# Altium PCB DBL 165 SerialIn Register (v2).PcbDoc
Units mm, origin at the board's own origin, x right, y up, seen from the top; angles counter-clockwise.
Board outline 152.4 x 101.6 mm, 2 copper layers (Top Layer, Bottom Layer); 50 components, 41 nets, 195 pads, 24 vias.
Unrouted connection lines stored in the file: 2.
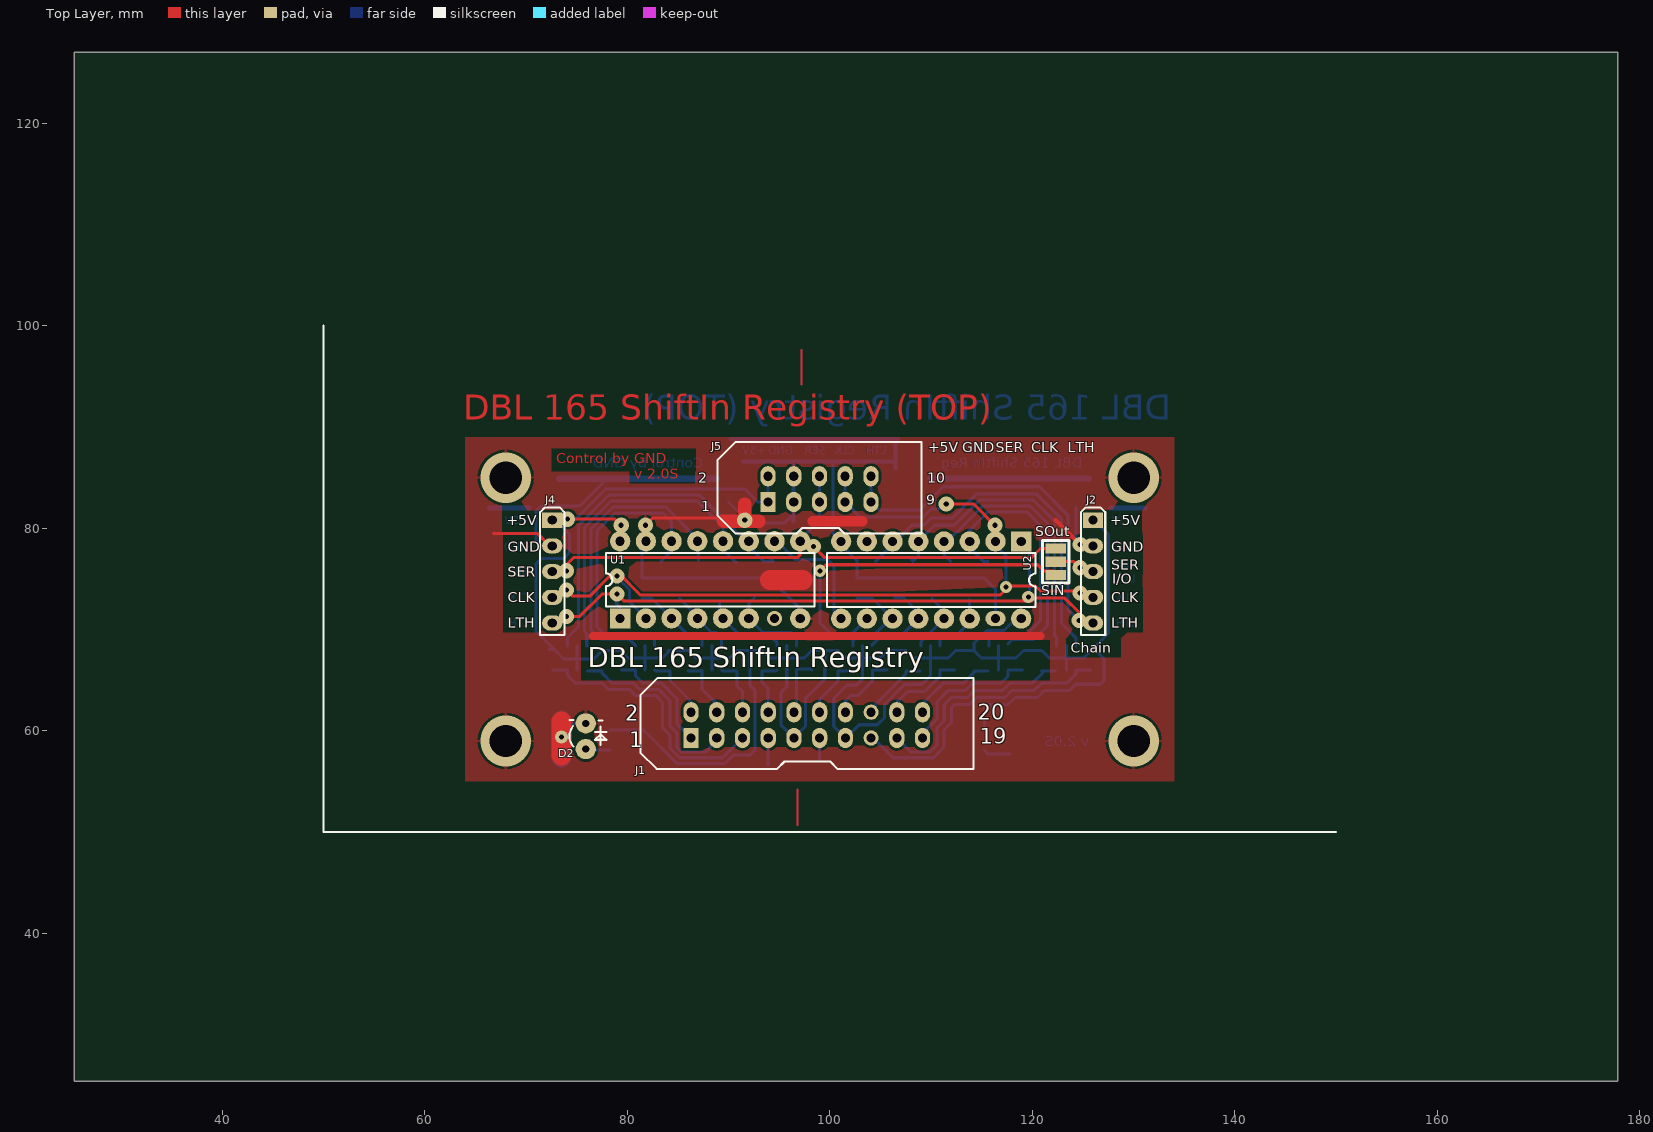
[diagram p0: Top Layer view]
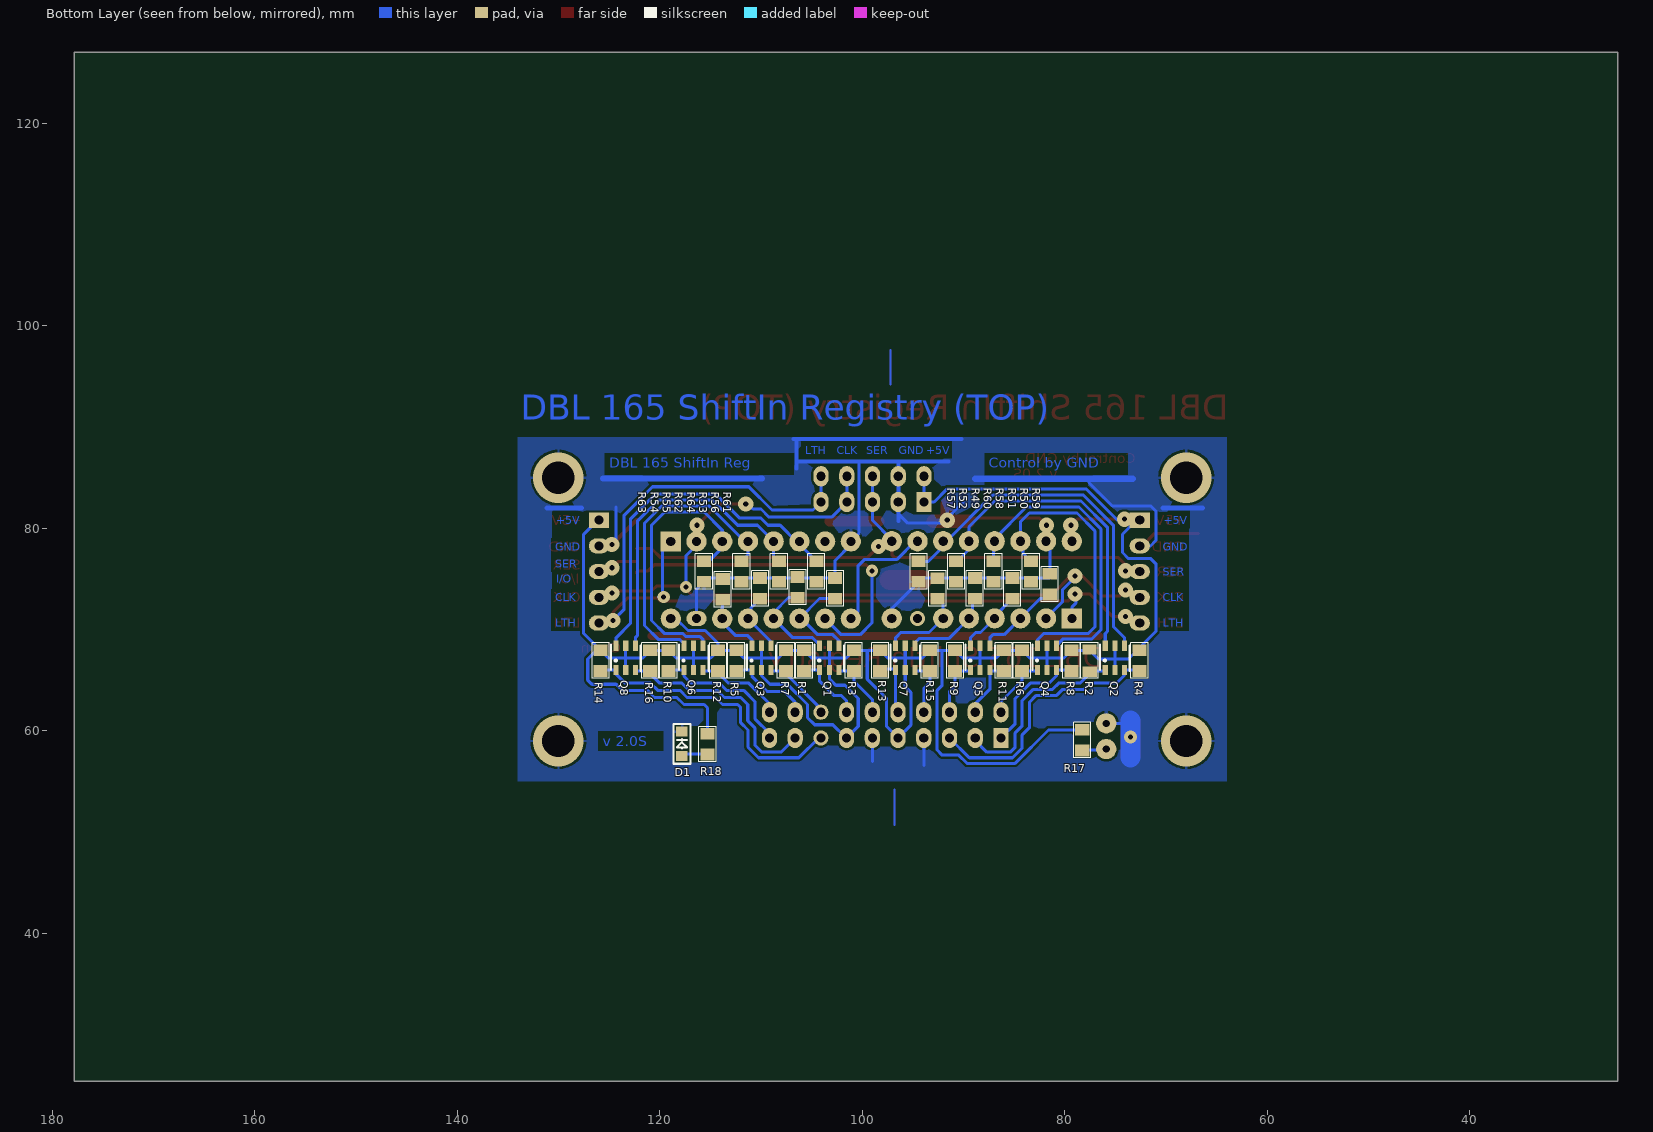
[diagram p1: Bottom Layer view, seen from below]
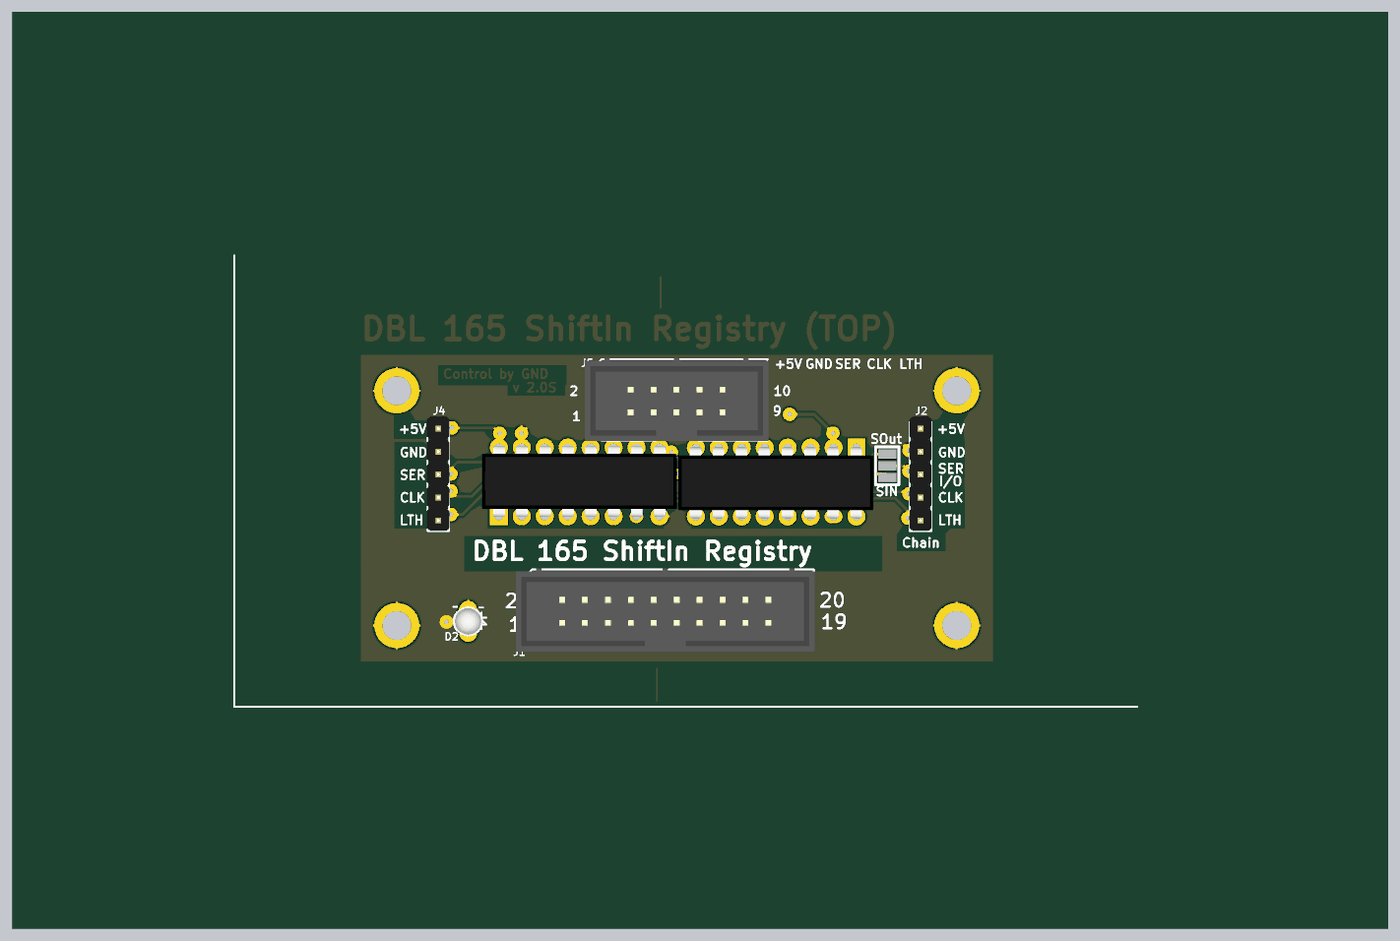
[diagram p2: 3D render of the assembled board from above, using the file's embedded part models]
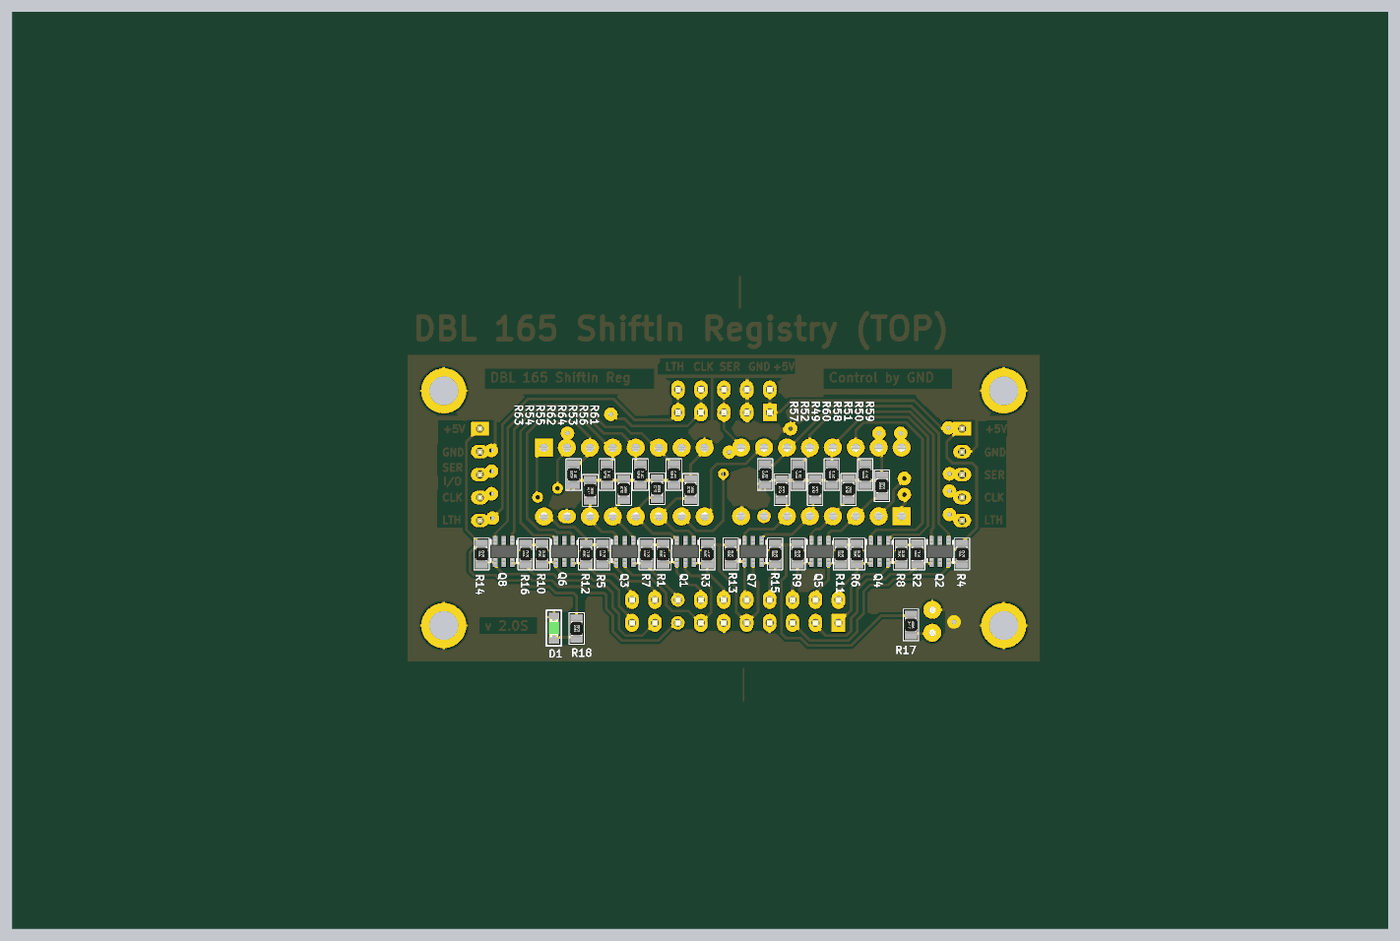
[diagram p3: 3D render of the assembled board from below, using the file's embedded part models]

## Layer stack, top to bottom
Top Solder: solder mask 0.0102, Solder Resist, Dk 3.5
Top Layer: signal copper 0.0356
Dielectric 1: dielectric 0.32, FR-4, Dk 4.8
Bottom Layer: signal copper 0.0356
Bottom Solder: solder mask 0.0102, Solder Resist, Dk 3.5

## Board outline
25.4,25.4 177.8,25.4 177.8,127 25.4,127

## Design rules (kind name [scope] priority, off if disabled: settings)
Clearance [All] p1: gap=0.25
ComponentClearance [All] p1: gap=0.1 collisioncheckmode=3 verticalgap=0.01 showdistances=FALSE
PolygonConnect [All] p1: connectstyle=Relief reliefconductorwidth=0.254 reliefentries=4 polygonreliefangle="90 Angle" airgapwidth=0.254
RoutingVias [All] p1: holewidth=0.711 width=1.27 viastyle="Through Hole" minholewidth=0.711 minwidth=1.27 maxholewidth=0.711 maxwidth=1.27
SilkToSilkClearance [All] p1: silktosilkclearance=0.01
SolderMaskExpansion [All] p1: expansion=0.102
Width [All] p1: maxlimit=2 minlimit=0.2 preferedwidth=0.5
27 further rules are at their usual default settings.

## Components (designator, comment, footprint, x,y, rotation, side; value= is the part's Value field where it differs from the comment)
D1 "Green" "LED SMD 0805 Green" 117.8,57.5 r90 bottom
D2 "FYL-3014GD" "LED Round 3mm Green" 75.9,58.2 r90 top
J1 "Input Buttons/keys" "LINE 2.54 x 20D (2 x 10) - BH" 86.3,59.3 r90 top
J2 "I/O Interface Connector" "Line 2.54 x 5" 126,80.8 r0 top
J4 "Interface Connector" "Line 2.54 x 5" 72.6,80.8 r0 top
J5 "Interface Connector" "LINE 2.54 x 10D (2 x 5) - BH" 93.9,82.6 r90 top
Q1 "IRF5850" TSOP-6 104.2,66 r90 bottom
Q2 "IRF5850" TSOP-6 76,66 r90 bottom
Q3 "IRF5850" TSOP-6 110.9,66 r90 bottom
Q4 "IRF5850" TSOP-6 82.7,66 r90 bottom
Q5 "IRF5850" TSOP-6 89.3,66 r90 bottom
Q6 "IRF5850" TSOP-6 117.6,66 r90 bottom
Q7 "IRF5850" TSOP-6 96.7,66 r90 bottom
Q8 "IRF5850" TSOP-6 124.3,66 r90 bottom
R1 "10kOm" "SMD 0805 (2012)"#1 105.7,65.9 r90 bottom
R2 "10kOm" "SMD 0805 (2012)"#2 77.525,65.909 r90 bottom
R3 "10kOm" "SMD 0805 (2012)"#1 100.8,65.9 r90 bottom
R4 "10kOm" "SMD 0805 (2012)"#1 72.6,65.9 r90 bottom
R5 "10kOm" "SMD 0805 (2012)"#1 112.4,65.9 r90 bottom
R6 "10kOm" "SMD 0805 (2012)"#1 84.2,65.9 r90 bottom
R7 "10kOm" "SMD 0805 (2012)"#1 107.5,65.9 r90 bottom
R8 "10kOm" "SMD 0805 (2012)"#1 79.3,65.9 r90 bottom
R9 "10kOm" "SMD 0805 (2012)"#1 90.8,65.9 r90 bottom
R10 "10kOm" "SMD 0805 (2012)"#1 119.1,65.9 r90 bottom
R11 "10kOm" "SMD 0805 (2012)"#1 86,65.9 r90 bottom
R12 "10kOm" "SMD 0805 (2012)"#1 114.2,65.9 r90 bottom
R13 "10kOm" "SMD 0805 (2012)"#1 98.2,65.9 r90 bottom
R14 "10kOm" "SMD 0805 (2012)"#1 125.8,65.9 r90 bottom
R15 "10kOm" "SMD 0805 (2012)"#1 93.3,65.9 r90 bottom
R16 "10kOm" "SMD 0805 (2012)"#1 120.9,65.9 r90 bottom
R17 "4.7k Om" "SMD 0805 (2012)"#1 78.3,60.1 r270 bottom
R18 "4.7k Om" "SMD 0805 (2012)"#1 115.3,59.7 r270 bottom
R49 "10kOm" "SMD 0805 (2012)"#1 90.7,74.7 r90 bottom
R50 "10kOm" "SMD 0805 (2012)"#1 83.3,74.7 r90 bottom
R51 "10kOm" "SMD 0805 (2012)"#1 85.2,75.1 r270 bottom
R52 "10kOm" "SMD 0805 (2012)"#1 92.6,75.091 r270 bottom
R53 "10kOm" "SMD 0805 (2012)"#1 106.4,75.2 r270 bottom
R54 "10kOm" "SMD 0805 (2012)"#1 113.8,75 r270 bottom
R55 "10kOm" "SMD 0805 (2012)"#1 111.9,74.7 r90 bottom
R56 "10kOm" "SMD 0805 (2012)"#1 104.5,74.7 r90 bottom
R57 "10kOm" "SMD 0805 (2012)"#1 94.4,74.7 r90 bottom
R58 "10kOm" "SMD 0805 (2012)"#1 87,74.7 r90 bottom
R59 "10kOm" "SMD 0805 (2012)"#1 81.5,75.5 r270 bottom
R60 "10kOm" "SMD 0805 (2012)"#1 88.9,75.1 r270 bottom
R61 "10kOm" "SMD 0805 (2012)"#1 102.7,75.1 r270 bottom
R62 "10kOm" "SMD 0805 (2012)"#1 110.1,75.1 r270 bottom
R63 "10kOm" "SMD 0805 (2012)"#1 115.6,74.7 r90 bottom
R64 "10kOm" "SMD 0805 (2012)"#1 108.2,74.7 r90 bottom
U1 "SN74HC165N" DIP-16#1 79.3,71.1 r0 top
U2 "SN74HC165N" DIP-16#2 118.9,78.7 r180 top

## Footprints (in the part's own frame and the unit in brackets; to place one, negate y for a bottom-side part, rotate by r counter-clockwise, add the part's x,y. Pads: shape width x height; smd on the part's side, far side on the other; paste and mask are expansions set on the pad)
DIP-16#1 [mm] "DIP; 16 Leads; Row Spacing 7.62 mm; Pitch 2.54 mm"
  rect 2x2 hole 0.9: 1(0,0)
  round 2 hole 0.9: 2(2.54,0) 3(5.08,0) 4(7.62,0) 5(10.16,0) 6(12.7,0) 8(17.78,0) 9(17.78,7.62) 10(15.24,7.62) 11(12.7,7.62) 12(10.16,7.62) 13(7.62,7.62) 14(5.08,7.62) 15(2.54,7.62) 16(0,7.62)
  round 1.5 hole 0.9: 7(15.24,0)
  silkscreen extent -1.41,1.16 19.19,6.46, body extent -1.87,-0.05 19.72,7.83, height 4.19
DIP-16#2 [mm] "DIP; 16 Leads; Row Spacing 7.62 mm; Pitch 2.54 mm"
  rect 2x2 hole 0.9: 1(0,0)
  round 2 hole 0.9: 2(2.54,0) 3(5.08,0) 4(7.62,0) 5(10.16,0) 6(12.7,0) 7(15.24,0) 8(17.78,0) 9(17.78,7.62) 10(15.24,7.62) 11(12.7,7.62) 12(10.16,7.62) 13(7.62,7.62) 14(5.08,7.62) 16(0,7.62)
  oval 2x1.5 hole 0.9: 15(2.54,7.62)
  silkscreen extent -1.41,1.16 19.19,6.46, body extent -1.87,-0.05 19.72,7.83, height 4.19
"LED Round 3mm Green" [mm]
  round 2 hole 0.7: A(0,0) K(2.54,0)
  silkscreen extent 0.25,-2.03 2.88,1.63, body extent -0.39,-1.65 2.91,1.64, height 5.51
"LED SMD 0805 Green" [mm]
  rect 1x1.143 smd: A(0,0) K(2.425,0)
  silkscreen extent -0.75,-0.82 3.17,0.83, body extent 0.22,-0.62 2.24,0.63, height 1.1
"Line 2.54 x 5" [mm]
  rect 2x1.5 hole 0.9: 1(0,0)
  oval 2x1.5 hole 0.9: 2(0,-2.54) 3(0,-5.08) 4(0,-7.62) 5(0,-10.16)
  silkscreen extent -1.2,-11.32 1.2,1.28, body extent -1.25,-11.33 1.25,1.37, height 8.2
"LINE 2.54 x 10D (2 x 5) - BH" [mm]
  rect 2x1.5 hole 0.9: 1(0,0)
  oval 2x1.5 hole 0.9: 2(2.54,0) 3(0,-2.54) 4(2.54,-2.54) 5(0,-5.08) 6(2.54,-5.08) 7(0,-7.62) 8(2.54,-7.62) 9(0,-10.16) 10(2.54,-10.16)
  silkscreen extent -3.1,-15.15 5.92,5, body extent -3.18,-15.25 6.03,5.1, height 8.84
"LINE 2.54 x 20D (2 x 10) - BH" [mm]
  rect 2x1.5 hole 0.9: 1(0,0)
  oval 2x1.5 hole 0.9: 2(2.54,0) 3(0,-2.54) 4(2.54,-2.54) 5(0,-5.08) 6(2.54,-5.08) 7(0,-7.62) 8(2.54,-7.62) 9(0,-10.16) 10(2.54,-10.16) 11(0,-12.7) 12(2.54,-12.7) 13(0,-15.24) 14(2.54,-15.24) 17(0,-20.32) 18(2.54,-20.32) 19(0,-22.86) 20(2.54,-22.86)
  round 1.5 hole 0.9: 15(0,-17.78) 16(2.54,-17.78)
  silkscreen extent -3.05,-27.87 5.92,5, body extent -3.18,-27.95 6.02,5.1, height 8.84
"SMD 0805 (2012)"#1 [mil]
  rect 45x55 smd: 1(0.35,0.98) 2(80.35,0.98)
  silkscreen extent -29,-32 109,34, body extent 1,-24 80,26, height 18
"SMD 0805 (2012)"#2 [mil]
  rect 39.37x55.12 smd: 1(-2.95,0) 2(83.66,0.98)
  silkscreen extent -29,-32 109,34, body extent 1,-24 80,26, height 18
TSOP-6 [mm]
  rect 1x0.5 smd: 1(0,0) 2(0,-0.95) 3(0,-1.9) 4(2.4,-1.9) 5(2.4,-0.95) 6(2.4,0)
  silkscreen extent -0.1,-2.4 2.5,0.5, body extent -0.15,-2.45 2.55,0.55, height 1

## Part data
D1: library part "Led SMD Green", "?2v ?20mA"
D2: library part "Led Round 3mm Green", "2.1v 10mA, 15-30mCd"
J1: library part "PLD-20 (2 x 10)", "Vert, Dbl line, Male"
J2 J4: library part PLS-5, "Vert, Sgl line, Male"
J5: library part "PLD-10 (2 x 5)", "Vert, Dbl line, Male"
Q1 Q2 Q3 Q4 Q5 Q6 Q7 Q8: "Dual P-Ch  20V - 0.135? - 2.2A"
R1 R2 R3 R4 R5 R6 R7 R8 R9 R10 R11 R12 R13 R14 R15 R16 R17 R18 R49 R50 R51 R52 R53 R54 R55 R56 R57 R58 R59 R60 R61 R62 R63 R64: library part "Res All Types"
U1 U2: "8-Bit Parallel-Load Shift Register"

## Free pads (board coordinates)
  rect 2x1 smd: 2(122.3,78) 3(122.3,75.4) 4(122.3,76.7)

## Via types
v1: diameter 1.5, hole 0.5, Top Layer to Bottom Layer, 16 vias
v2: diameter 5, hole 3.2, Top Layer to Bottom Layer, 4 vias
v3: diameter 1.2, hole 0.5, Top Layer to Bottom Layer, 3 vias
v4: diameter 1.3, hole 0.5, Top Layer to Bottom Layer, 1 vias

## Nets (pads, with @x,y where several pads share a name; then routed paths per layer and width w, separated by ;. In a path a pad name is that pad's centre, name@x,y a point inside that pad or via, vN(x,y) a via of type N, cw(c..) or ccw(c..) an arc to the next point about the centre after c; other vN are vias at no path point)
165TO165: U1.10 U2.9 | length 12.4
  Bottom Layer w0.3: U1.10 94.78,78.72 96.6,76.9 99.8,76.9 100.4,76.3 100.4,71.8 U2.9
+5V: J1.9 J1.13 J2.1 J4.1 J5.1 J5.2 Q1.2 Q1.5 Q2.2 Q2.5 Q3.2 Q3.5 Q4.2 Q4.5 Q5.2 Q5.5 Q6.2 Q6.5 Q7.2 Q7.5 Q8.2 Q8.5 R1.2 R2.2 R3.2 R4.2 R5.2 R6.2 R7.2 R8.2 R9.2 R10.2 R11.2 R12.2 R13.2 R14.2 R15.2 R16.2 R17.1 R18.1 U1.16 U2.16 | length 229.1
  Top Layer w0.3: v1(74.1,80.9) 78.8,80.9 v1(79.4,80.3)
  Bottom Layer w0.3: R4.2@72.259,68.041 72.625,68.041 R4.2@72.759,68.041 ; J4.1 J4.1@72.9,80.8 ; v1@74.1,80.8 J4.1@72.9,80.8 ; v1@74.8,80.8 77.9,83.9 91.6,83.9 92.9,82.6 J5.1 J5.2 ; Q2.2 75.05,67.1 ; Q2.5 75.05,67.1 ; R17.1 81.609,60.091 84.9,56.8 84.912,56.8 84.924,56.788 89.651,56.788 90.463,57.6 92.1,57.6 92.6,58.1 92.6,64 92.1,64.5 92.1,67.941 ; Q4.2 81.75,67.2 ; Q4.5 81.75,67.2 ; R6.2@84.025,67.941 R11.2 86.766,67.2 88.35,67.2 ; R6.2 83.484,67.2 81.75,67.2 ; Q5.2 88.35,67.2 ; Q5.5 88.35,67.2 ; Q7.5 95.75,67.2 ; 99.5,67.916 99.5,65.1 97.61,63.21 97.61,60.45 J1.9 95.2,60.56 95.2,63.8 95.75,64.35 Q7.2 95.75,67.2 ; J1.13 100.39,60.45 100.39,63.19 101.7,64.5 102.6,64.5 103.25,65.15 Q1.2 103.25,67.2 ; J1.13@101.7,59.4 102.9,60.6 104.7,60.6 105.4,61.3 105.4,62.6 107.4,64.6 109.1,64.6 109.95,65.45 Q3.2 109.95,67.2 ; Q1.5 103.25,67.2 ; Q3.5 109.95,67.2 ; R18.1@115.275,60.091 115.275,62.275 115.6,62.6 117.6,62.6 118.3,63.3 120.5,63.3 121.2,64 123.7,64 124.3,64.6 126.7,64.6 127.1,65 127.1,67.1 126.259,67.941 R14.2 ; Q6.2 116.65,67.2 ; Q6.5 116.65,67.2 ; U2.16 118.38,71.08 117.2,69.9 115.5,69.9 114.225,68.625 R12.2 ; Q8.2 123.35,67.2 ; Q8.5 123.35,67.2 ; J2.1@126,80.4 126.5,80.4 127.5,79.4 127.5,69.616 R14.2 ; R4.2@72.759,68.041 73.7,67.1 75.05,67.1 ; R4.2@72.759,68.041 71,69.8 71,76.5 71.5,77 73.7,77 74.3,77.6 74.3,79.4 J4.1@72.9,80.8 ; 75.05,67.1 76.684,67.1 77.525,67.941 R8.2 80.066,67.2 81.75,67.2 ; 88.35,67.2 90.1,67.2 90.841,67.941 R15.2 94.066,67.2 95.75,67.2 ; 95.75,67.2 97.484,67.2 R13.2 R3.2 101.566,67.2 103.25,67.2 ; 103.25,67.2 104.984,67.2 R1.2 R7.2 108.266,67.2 109.95,67.2 ; 109.95,67.2 111.684,67.2 R5.2 R12.2 ; R12.2 114.966,67.2 116.65,67.2 ; 116.65,67.2 118.384,67.2 R10.2 R16.2 121.666,67.2 123.35,67.2 ; 123.35,67.2 125.084,67.2 R14.2
"BT 1": J1.5 Q2.3 R4.1 | length 25.7
  Bottom Layer w0.3: R4.1@72.634,66 Q2.3 74.1,65.5 74.9,64.7 77.5,64.7 78.1,64.1 80.2,64.1 80.8,63.5 82.8,63.5 83.5,62.8 83.5,60.3 84.2,59.6 84.2,58.295 85.153,57.342 89.422,57.342 J1.5
"BT 2": J1.3 Q2.1 R2.1 | length 19.2
  Bottom Layer w0.3: Q2.1@76.091,65.909 77.525,65.909 77.525,65.675 78.5,64.7 80.6,64.7 81.2,64.1 83.1,64.1 84.2,63 84.2,60.5 84.9,59.8 84.9,58.379 85.383,57.896 87.696,57.896 88.84,59.04 J1.3
"BT 3": J1.1 Q4.3 R8.1 | length 12.1
  Bottom Layer w0.3: R8.1@79.416,66 Q4.3 80.8,65.464 81.564,64.7 83.4,64.7 84.9,63.2 84.9,60.7 J1.1 J1.1@86.3,60
"BT 4": J1.2 Q4.1 R6.1 | length 6.5
  Bottom Layer w0.3: Q4.1 82.791,65.909 R6.1 84.225,64.975 86.3,62.9 J1.2
"BT 5": J1.4 Q5.3 R11.1 | length 6.2
  Bottom Layer w0.3: R11.1 87.309,65.909 Q5.3 87.4,64.1 88.84,62.66 J1.4
"BT 6": J1.6 Q5.1 R9.1 | length 5.9
  Bottom Layer w0.3: Q5.1 89.391,65.909 R9.1 90.825,64.455 91.38,63.9 J1.6
"BT 7": J1.8 Q7.3 R15.1 | length 5.8
  Bottom Layer w0.3: J1.8 93.92,64.18 93.325,64.775 R15.1 94.709,65.909 Q7.3
"BT 8": J1.10 Q7.1 R13.1 | length 6.2
  Bottom Layer w0.3: J1.10@96.7,62.08 J1.10 96.46,62.36 96.7,62.6 Q7.1 96.8,66.1 98.134,66.1 R13.1@98.225,66.009
"BT 9": J1.12 Q1.3 R3.1 | length 6.2
  Bottom Layer w0.3: J1.12 99,63.1 100.825,64.925 R3.1 Q1.3@102.209,65.909
"BT 10": J1.14 Q1.1 R1.1 | length 7.4
  Bottom Layer w0.3: J1.14 101.54,62.94 102.1,63.5 102.817,63.5 104.2,64.883 Q1.1 R1.1@105.634,66 ; J1.14@101.7,62.3 J1.14@102,62.3
"BT 11": J1.16 Q3.3 R7.1 | length 6.9
  Bottom Layer w0.3: J1.16 104.08,62.18 107.525,65.625 R7.1 Q3.3@108.909,65.909
"BT 12": J1.18 Q3.1 R5.1 | length 8.4
  Bottom Layer w0.3: J1.18 106.62,62.82 107.7,63.9 109.4,63.9 110.9,65.4 Q3.1 R5.1@112.334,66
"BT 13": J1.20 Q6.3 R12.1 | length 8.7
  Bottom Layer w0.3: J1.20 109.16,62.66 111.2,64.7 113.2,64.7 114.225,65.725 R12.1 Q6.3@115.609,65.909
"BT 14": J1.19 Q6.1 R10.1 | length 14.3
  Bottom Layer w0.3: J1.19 109.16,59.76 110.6,61.2 110.6,62.9 111.7,64 113.4,64 114.1,64.7 116.9,64.7 117.6,65.4 Q6.1 R10.1@119.034,66
"BT 15": J1.17 Q8.3 R16.1 | length 21.6
  Bottom Layer w0.3: J1.17 108.024,57.896 109.896,57.896 110.6,58.6 110.6,60.3 111.3,61 111.3,62.6 112,63.3 113.6,63.3 114.3,64 117.1,64 117.8,64.7 120,64.7 R16.1@121.067,65.767 ; R16.1 Q8.3@122.309,65.909
"BT 16": J1.15 Q8.1 R14.1 | length 28.2
  Bottom Layer w0.3: J1.15 104.3,59.3 106.258,57.342 110.242,57.342 111.283,58.383 111.283,60.083 112,60.8 112,62.3 112.3,62.6 113.8,62.6 114.5,63.3 117.3,63.3 118,64 120.2,64 120.9,64.7 123.4,64.7 124.3,65.6 Q8.1 R14.1@125.734,66
CLK165: J2.4 J4.4 J5.7 J5.8 U1.2 U2.2 | length 82.7
  Top Layer w0.3: v1(74,73.9) 74.6,73.3 76.3,73.3 78.3,75.3 v1(79,75.3) ; v1@79.2,75.5 81.3,73.4 116.8,73.4 117.7,74.3 120.3,74.3 120.8,73.8 124.5,73.8 v1(124.7,73.6) ; v1(111.5,82.4) 114.2,82.4 v1(116.3,80.3)
  Bottom Layer w0.3: v1@78.975,75.188 80.2,73.963 80.2,72.771 81.84,71.131 U1.2 ; J5.8 J5.7 103.02,81.1 109.2,81.1 110,81.9 110.8,81.9 v1@111.5,82.6 ; U2.2 116.36,78.34 117.4,77.3 v3(117.4,74.2)
GND: D1.K D2.K J1.7 J1.11 J2.2 J4.2 J5.3 J5.4 R49.1 R50.1 R51.1 R52.1 R53.1 R54.1 R55.1 R56.1 R57.1 R58.1 R59.1 R60.1 R61.1 R62.1 R63.1 R64.1 U1.8 U1.15 U2.8 U2.15 | length 248.1
  Top Layer w0.3: 66.8,79.5 71.1,79.5 72.34,78.26 J4.2 ; v1(81.8,80.3) 82.5,81 v1@91.6,81 ; v1@91.4,80.8 v1(91.6,80.8)
  Top Layer w0.4: 122.3,80.825 v1(124.725,78.4)
  Top Layer w0.8: 76.6,69.35 120.8,69.35
  Top Layer w1: 98.3,80.7 103.2,80.7
  Top Layer w1.3: 89.5,80.7 93,80.7 ; v1(91.6,80.8) 91.6,82.4
  Top Layer w2: 73.5,57.6 v4(73.5,59.4) 73.5,60.9 ; 94.1,74.9 97.302,74.9
  Bottom Layer w0.3: J4.2 71.54,78.26 71,78.8 71,81.7 71.5,82.2 75.3,82.2 77.6,84.5 ; 73.5,61 73.76,60.74 D2.K ; U1.15@81.475,77.825 81.475,75.091 R51.1 R60.1 94.043,75.091 R57.1 97.08,72.054 U1.8 ; U1.15@81.84,78.035 U1.15 ; 90,82.6 92.1,80.5 95.5,80.5 96.4,81.4 96.44,81.44 J5.3 J5.3@96.44,83.06 ; v1@91.4,80.8 v1(91.6,80.8) ; 93.92,56.57 J1.7 ; 98.961,56.955 J1.11@98.961,59.295 ; 100.3,86.6 100.3,79.52 U2.8 101.12,78.38 102.675,76.825 R61.1 R62.1 115.243,75.091 R63.1 116.36,73.974 U2.15 U2.15@116.36,71.79 ; v1@124.3,78.3 124.3,82.1
  Bottom Layer w0.4: 90.2,88.8 106.8,88.8 ; 91.5,86.6 96.4,86.6 ; 96.4,80.7 96.4,81.4 96.4,86.6 ; 106.5,85.9 106.5,88.8 ; 106.5,86.6 100.3,86.6 96.4,86.6
  Bottom Layer w0.5: 66.4,82 70.3,82 ; 127.7,82 131.1,82
  Bottom Layer w0.6: 109.9,84.9 125.6,84.9
  Bottom Layer w0.65: 73.3,84.873 88.827,84.873
  Bottom Layer w2: 73.5,57.4 v4(73.5,59.4) 73.5,61
  other v2: 68,59 130,59 68,85 130,85
"IN 1": Q2.4 R57.2 U1.11 | length 36.4
  Bottom Layer w0.3: Q2.4 74.1,69.2 75.2,70.3 75.2,80.3 78.2,83.3 87.1,83.3 91.68,78.72 U1.11 92,78.2 93.459,76.741 R57.2 R57.2@94.066,77.1
"IN 2": Q2.6 R49.2 U1.12 | length 31.6
  Bottom Layer w0.3: Q2.6 76,69.6 75.8,69.8 75.8,80.1 78.4,82.7 86.9,82.7 89.46,80.14 U1.12 89.46,77.906 90.725,76.641 R49.2@90.725,76.655
"IN 3": Q4.4 R58.2 U1.13 | length 29.9
  Bottom Layer w0.3: Q4.4 80.8,68.45 80.2,69.05 77.35,69.05 76.4,70 76.4,79.9 78.6,82.1 83.8,82.1 86.92,78.98 U1.13 ; R58.2@87.025,76.841 U1.13@87.025,78.72
"IN 4": Q4.6 R50.2 U1.14 | length 29
  Bottom Layer w0.3: Q4.6 82.7,69 82.1,69.6 77.7,69.6 77,70.3 77,79.7 78.8,81.5 83.5,81.5 84.38,80.62 U1.14 84.125,78.465 84.125,77.541 R50.2
"IN 5": Q5.4 R59.2 U1.3 | length 8.6
  Bottom Layer w0.3: R59.2@81.475,73.059 82.421,73.059 U1.3 85.98,69.5 87.1,69.5 87.4,69.2 Q5.4 Q5.4@87.4,68.7
"IN 6": Q5.6 R51.2 U1.4 | length 6.6
  Bottom Layer w0.3: R51.2 86.92,71.314 U1.4 88.32,69.7 88.8,69.7 89.3,69.2 Q5.6
"IN 7": Q7.4 R60.2 U1.5 | length 8.7
  Bottom Layer w0.3: U1.5@89.1,71.056 R60.2@89.1,72.8 ; U1.5@89.675,71.315 U1.5 91.46,69.1 94.4,69.1 94.8,68.7 Q7.4
"IN 8": Q7.6 R52.2 U1.6 | length 8.6
  Bottom Layer w0.3: R52.2@92.575,73.159 92,72.584 U1.6 93.4,69.7 96.2,69.7 96.7,69.2 Q7.6
"IN 9": Q1.4 R61.2 U2.11 | length 9.6
  Bottom Layer w0.3: Q1.4 102.3,68.9 102.9,69.5 104.4,69.5 105.98,71.08 U2.11 104.221,73.059 R61.2
"IN 10": Q1.6 R53.2 U2.12 | length 9.3
  Bottom Layer w0.3: Q1.6@104.15,68.45 104.9,69.2 106.86,69.2 U2.12 108.74,71.694 107.275,73.159 R53.2
"IN 11": Q3.4 R62.2 U2.13 | length 6.1
  Bottom Layer w0.3: Q3.4 109,68.8 U2.13 110.975,71.385 110.975,72.159 R62.2
"IN 12": Q3.6 R54.2 U2.14 | length 6.6
  Bottom Layer w0.3: Q3.6 110.9,69 111.3,69.4 112.5,69.4 113.82,70.72 U2.14 113.82,72.104 113.775,72.059 R54.2
"IN 13": Q6.4 R63.2 U2.3 | length 28.2
  Bottom Layer w0.3: R63.2 115.159,76.741 113.82,78.08 U2.3 113.82,79.82 115.6,81.6 119.5,81.6 120.8,80.3 120.8,70.9 119.5,69.6 117.7,69.6 117.4,69.3 116,69.3 115.7,69 Q6.4
"IN 14": Q6.6 R55.2 U2.4 | length 29.3
  Bottom Layer w0.3: R55.2 111.28,77.386 U2.4 111.6,78.7 115.1,82.2 119.8,82.2 121.5,80.5 121.5,70.4 120.1,69 118,69 Q6.6@117.6,68.6
"IN 15": Q8.4 R64.2 U2.5 | length 31.1
  Bottom Layer w0.3: R64.2@107.84,77.126 R64.2 108.74,77.256 U2.5 110.34,80.3 112.3,80.3 114.8,82.8 120.1,82.8 122.2,80.7 122.2,69.4 122.4,69.2 Q8.4
"IN 16": Q8.6 R56.2 U2.6 | length 35.4
  Bottom Layer w0.3: R56.2 106.2,78.416 U2.6 106.5,78.7 108.1,80.3 109.3,80.3 110,81 112.1,81 114.5,83.4 120.4,83.4 122.9,80.9 122.9,70.6 124.3,69.2 Q8.6
LATCH165: J2.5 J4.5 J5.9 J5.10 U1.1 U2.1 | length 98.8
  Top Layer w0.3: v1(74,71.3) 75.3,71.3 77.5,73.5 v1(79,73.5) 79.7,72.8 119.9,72.8 120.2,73.1 123.2,73.1 124.6,71.7 v1(124.6,70.9)
  Bottom Layer w0.3: v1(79,73.5) 78.8,73.5 78.9,73.4 78.9,72.6 79.3,72.2 U1.1 ; J5.10 J5.9 104.86,81.8 108.9,81.8 111.2,84.1 120.7,84.1 123.5,81.3 123.5,72 v1(124.6,70.9) ; U2.1@118.9,77.95 U2.1 119.3,78.7 119.7,78.3 v3@119.7,73.1 ; v3(119.6,73.2) v3@120.1,73.2
NetD1_A: D1.A R18.2 | length 2.7
  Bottom Layer w0.3: R18.2@115.275,58.059 115.634,57.7 D1.A@117.8,57.7
NetD2_A: D2.A R17.2 | length 2.5
  Bottom Layer w0.3: D2.A@76.075,58.8 76.775,58.1 R17.2@78.275,58.1
"SERIAL IN": pad.3 U2.10 | length 34.8
  Top Layer w0.3: v3(99.035,75.8) 99.635,76.4 120.529,76.4 121.133,75.796 122.104,75.796 pad.3@122.3,75.6
  Bottom Layer w0.3: v3@99.035,75.9 v3(99.035,75.8) 99.035,70.665 100.2,69.5 102.08,69.5 U2.10
SERIALOUT165: J2.3 J4.3 J5.5 J5.6 pad.2 pad.4 U1.9 | length 59.8
  Top Layer w0.3: v1@73.7,76.1 74.7,77.1 96.8,77.1 97.08,77.38 U1.9 ; v1(98.4,78.2) 99.5,77.1 119.9,77.1 120.8,78 pad.2 ; pad.4 124.1,76.7 v1(124.7,76.1)
  Bottom Layer w0.3: U1.9 97.08,78.88 98.98,80.78 J5.5 J5.6
  other v1: 74,75.8
pads on no net: U1.7 U2.7
copper on no net: | length 13.8
  Top Layer w0.2: 96.8,50.7 96.8,54.2 ; 97.2,94.2 97.2,97.6
  Bottom Layer w0.2: 96.8,50.7 96.8,54.2 ; 97.2,94.2 97.2,97.6

## Polygon pours and split planes (outlines as drawn)
GND on Bottom Layer "Top Layer-No Net" (solid, pour order 4): 64,89 134,89 134,55 64,55
GND on Top Layer "Top Layer-No Net" (solid, pour order 3): 64,89 134,89 134,55 64,55

## Other copper
Top Layer:
  text "DBL 165 ShiftIn Registry (TOP)" at 63.8,90.7 h2.5
  text "Control by GND" at 73,86.4 h1
  text "v 2.0S" at 80.7,84.9 h1
  text "+5V" at 68.1,80.3 h1
  text "+5V" at 127.7,80.3 h1
  text "GND" at 68.2,77.7 h1
  text "GND" at 127.8,77.7 h1
  text "SER" at 127.8,75.9 h1
  text "SER" at 68.2,75.2 h1
  text "I/O" at 127.9,74.5 h1
  text "CLK" at 68.2,72.7 h1
  text "CLK" at 127.8,72.7 h1
  text "LTH" at 68.2,70.2 h1
  text "LTH" at 127.8,70.2 h1
  text "Chain" at 123.8,67.7 h1
  text "DBL 165 ShiftIn Registry" at 76.1,66.3 h2
Bottom Layer:
  text "DBL 165 ShiftIn Registry (TOP)" at 133.7,90.7 h2.5
  text "+5V" at 93.7,87.3 h0.8
  text "GND" at 96.4,87.3 h0.8
  text "SER" at 99.6,87.3 h0.8
  text "CLK" at 102.5,87.3 h0.8
  text "LTH" at 105.6,87.3 h0.8
  text "Control by GND" at 87.5,86 h1
  text "DBL 165 ShiftIn Reg" at 125,86 h1
  text "+5V" at 70.2,80.4 h0.8
  text "+5V" at 130.2,80.4 h0.8
  text "GND" at 70.3,77.8 h0.8
  text "GND" at 130.3,77.8 h0.8
  text "SER" at 130.3,76.1 h0.8
  text "SER" at 70.3,75.3 h0.8
  text "I/O" at 130.2,74.6 h0.8
  text "CLK" at 70.3,72.8 h0.8
  text "CLK" at 130.3,72.8 h0.8
  text "LTH" at 70.3,70.3 h0.8
  text "LTH" at 130.3,70.3 h0.8
  text "v 2.0S" at 125.6,58.5 h1

## Silkscreen, mask and mechanical layers (free items; w line width, h text height)
Top Overlay:
  lines w0.2: 50,100 50,50 150,50
  lines w0.3: 121,74.6 121,78.8 123.6,78.8 123.6,74.6 121,74.6
  text "+5V" at 109.7,87.5 h1
  text "GND" at 113.1,87.5 h1
  text "SER" at 116.4,87.5 h1
  text "CLK" at 119.9,87.5 h1
  text "LTH" at 123.5,87.5 h1
  text "+5V" at 68.1,80.3 h1
  text "+5V" at 127.7,80.3 h1
  text "SOut" at 120.3,79.2 h1
  text "GND" at 68.2,77.7 h1
  text "GND" at 127.8,77.7 h1
  text "SER" at 127.8,75.9 h1
  text "SER" at 68.2,75.2 h1
  text "I/O" at 127.9,74.5 h1
  text "SIN" at 120.9,73.4 h1
  text "CLK" at 68.2,72.7 h1
  text "CLK" at 127.8,72.7 h1
  text "LTH" at 68.2,70.2 h1
  text "LTH" at 127.8,70.2 h1
  text "Chain" at 123.8,67.7 h1
  text "DBL 165 ShiftIn Registry" at 76.1,66.3 h2

## Text inside footprints (layer, text, board x,y; h text height)
J1: Top Overlay "20" at 114.6,61.1 h1.52; Top Overlay "19" at 114.8,58.7 h1.52; Top Overlay "2" at 79.8,61 h1.52; Top Overlay "1" at 80.2,58.4 h1.52
J5: Top Overlay "1" at 87.3,81.7 h1; Top Overlay "2" at 87,84.5 h1; Top Overlay "9" at 109.5,82.3 h1; Top Overlay "10" at 109.6,84.5 h1